# EAGLE board mini_shirasu (EAGLE 9.6.2)
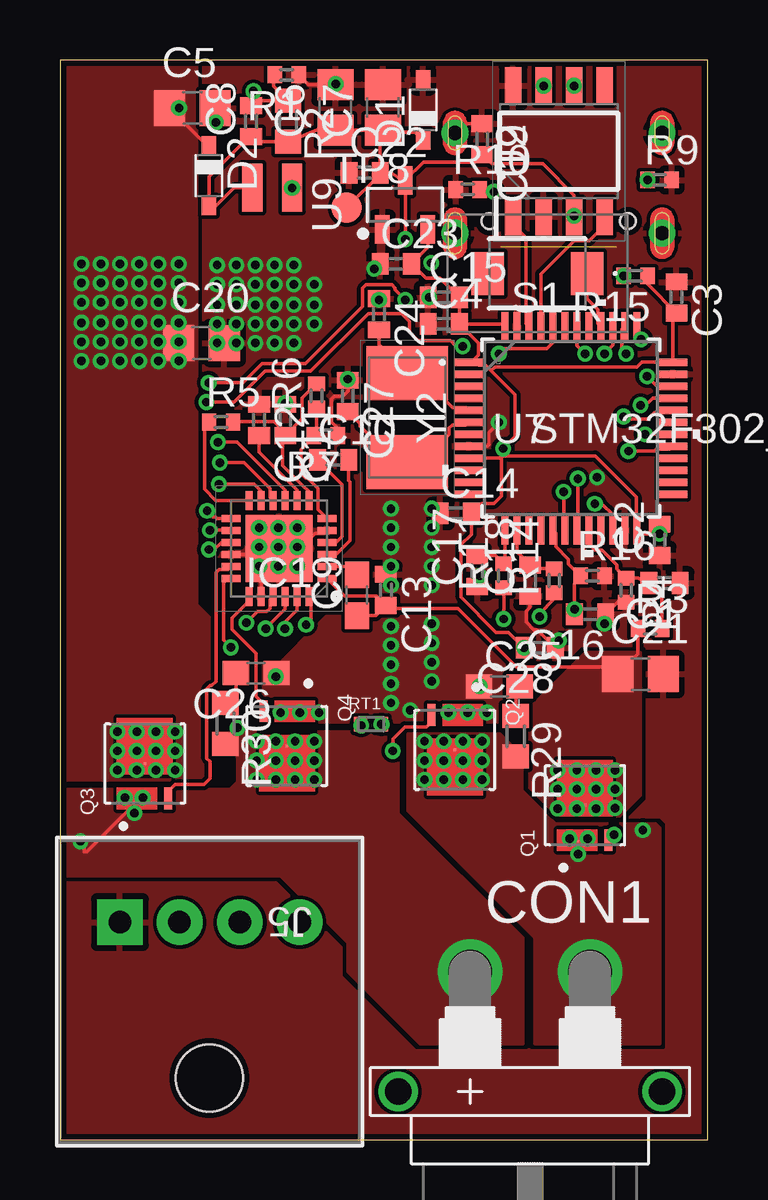
[diagram p0: board, top side]
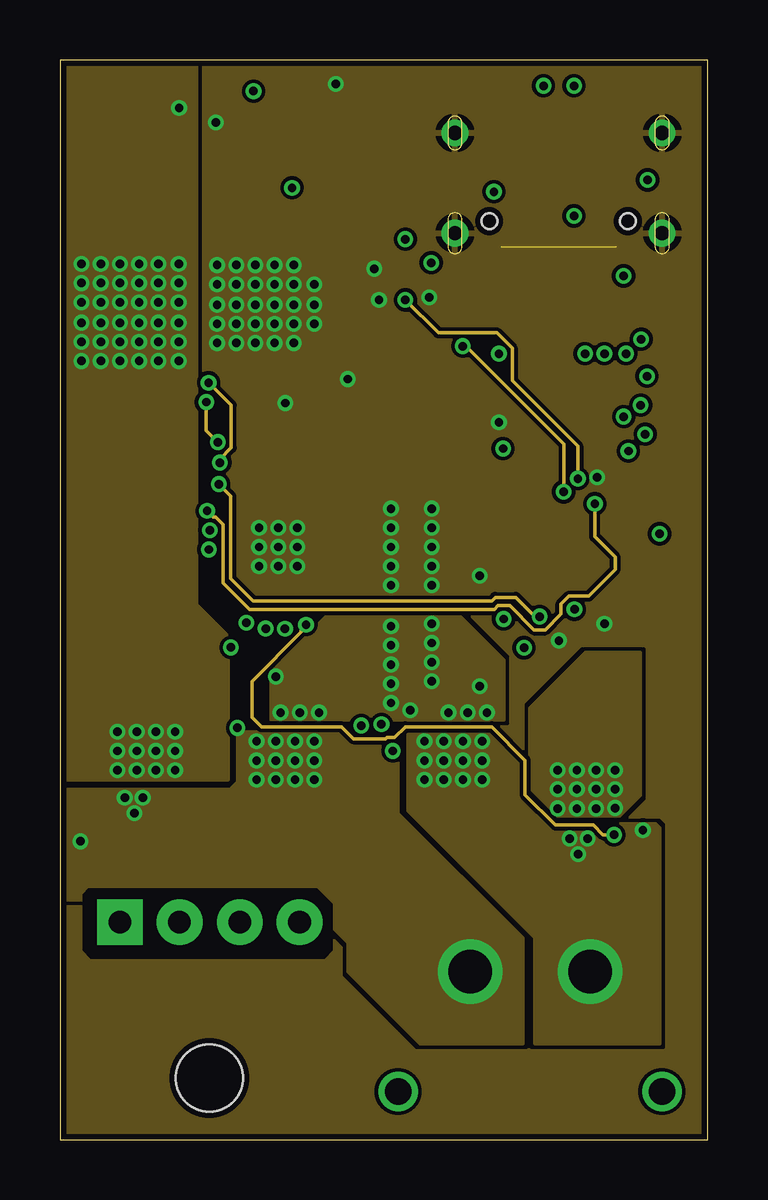
[diagram p1: board, inner layer Route2]
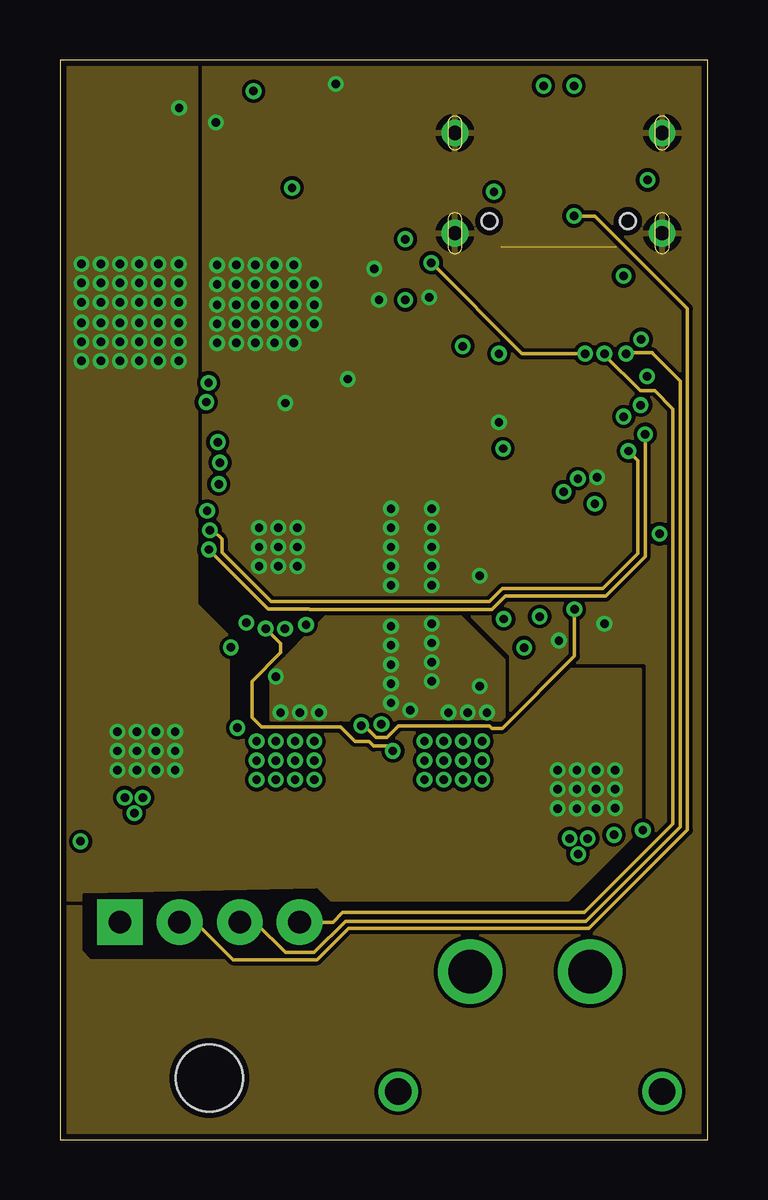
[diagram p2: board, inner layer Route15]
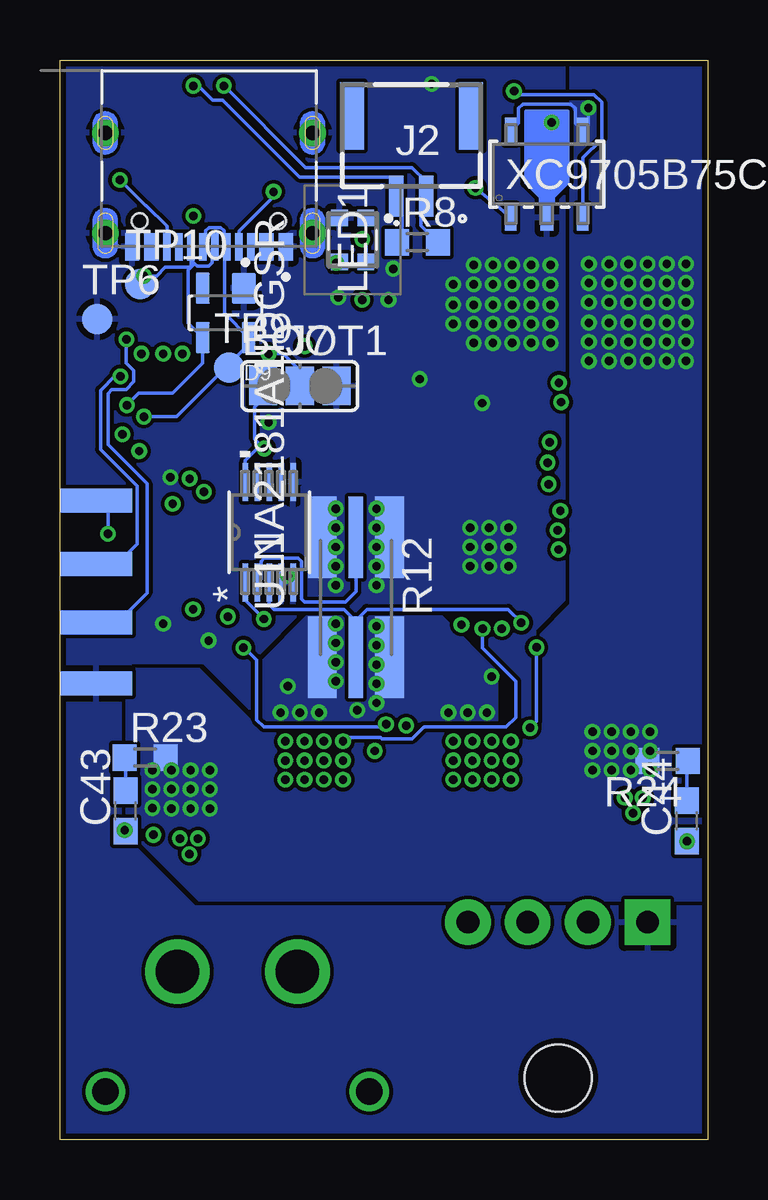
[diagram p3: board, bottom side, seen from below]

Size 27 x 45 mm. Coordinates in mm from the lower left corner, seen from the top.
Outline: 0,0 27,0 27,45 0,45 0,0
Copper layers (1+2*15+16): Top 0.035mm / dielectric 1.5mm / Route2 0.0175mm / dielectric 1.1mm / Route15 0.0175mm / dielectric 0.2mm / Bottom 0.035mm
Design rules "SeeedStudio_2layer_DRU_no_angle_20140221 *": minimum track width 6mil, minimum drill 12mil, track to track 6mil, track to pad 6mil, pad to pad 6mil, via to via 6mil, smd to smd 0mil, copper to edge 10mil, drill to drill 10mil, minimum pad ring 10mil, minimum via ring 6mil, stop-mask expansion 2mil, vias tented up to drill 100mil, thermal gap 10mil

## Footprints (pad centres in the part's own frame; a part is rotated, then mirrored left to right if it is on the bottom)
SJ_2 = smd 1.168 x 1.6: 1 -1.524,0; 2 0,0; 3 1.524,0
C0402 = smd 0.7 x 0.9: 1 -0.65,0; 2 0.65,0
C0805 = smd 1.3 x 1.5: 1 -0.95,0; 2 0.95,0
C0603 = smd 1.1 x 1: 1 -0.85,0; 2 0.85,0
XT30PW-F = drill 1.8: + 2.5,0; - -2.5,0 | drill 1.1: P$3 -5.5,5; P$4 5.5,5
SOD323_ST = smd 0.8 x 0.6: A 1.25,0; C -1.25,0
SOT143 = smd 0.99 x 1.3: 1 -0.76,-1.025 | smd 0.59 x 1.3: 2 0.96,-1.025; 3 0.96,1.025; 4 -0.96,1.025
QFN50P400X400X100-25N = smd 0.8 x 0.3: 1 -2,1.25; 2 -2,0.75; 3 -2,0.25; 4 -2,-0.25; 5 -2,-0.75; 6 -2,-1.25; 13 2,-1.25; 14 2,-0.75; 15 2,-0.25; 16 2,0.25; 17 2,0.75; 18 2,1.25 | smd 0.3 x 0.8: 7 -1.25,-2; 8 -0.75,-2; 9 -0.25,-2; 10 0.25,-2; 11 0.75,-2; 12 1.25,-2; 19 1.25,2; 20 0.75,2; 21 0.25,2; 22 -0.25,2; 23 -0.75,2; 24 -1.25,2 | smd 2.8 x 2.8: 25 0,0
BM02B-GHS-TBT_1 = smd 0.6 x 1.7: 1 0.625,0; 2 -0.625,0 | smd 1 x 2.8: 3 -2.475,-3.35; 4 2.475,-3.35
CONN4_1744426-4 = drill 0.94 pad 1.905 square: 1 7.493,0 | drill 0.94 pad 1.905: 2 5.004,0; 3 2.489,0; 4 0,0 | hole 2.794: 3.759,6.502
NELTRON_5077CR-16SMC2-BK-TR = smd 0.6 x 1.15: A1_B12 -3.2,1.065; A4_B9 -2.4,1.065; B1_A12 3.2,1.065; B4_A9 2.4,1.065 | smd 0.3 x 1.15: A5 -1.25,1.065; A6 -0.25,1.065; A7 0.25,1.065; A8 1.25,1.065; B5 1.75,1.065; B6 0.75,1.065; B7 -0.75,1.065; B8 -1.75,1.065 | drill 0.6 pad 1: S1 -4.32,-3.68; S2 4.32,-3.68; S3 -4.32,0.5; S4 4.32,0.5 | hole 0.65: -2.89,0; 2.89,0
INDUCTOR_1008 = smd 0.85 x 2: P$1 0.825,0; P$2 -0.825,0
WS2812C2020 = smd 0.7 x 0.7: 1 0.915,-0.55; 2 0.915,0.55; 3 -0.915,0.55; 4 -0.915,-0.55
TRANS_BSZ146N10LS5ATMA1 = smd 0.1 x 0.1: 1_3 -1.5,0.3; 5_8 0,0 | smd 0.9 x 0.34: 4 -1.45,-0.975
R0402 = smd 0.6 x 0.7: 1 -0.5,0; 2 0.5,0
R0603 = smd 1 x 1.1: 1 -0.85,0; 2 0.85,0
2512-4PAD = smd 3.4 x 1.2: 1 -2.5,1.4; 2 -2.5,-1.4; 3 2.5,1.4; 4 2.5,-1.4 | smd 3.4 x 0.6: 5 -2.5,0; 6 2.5,0
THRMC1005X55N = smd 0.54 x 0.6: 1 -0.432,0; 2 0.432,0
TS1088AR02016 = smd 1.35 x 1.8: 1 -2.075,0; 2 2.075,0
B1,27 = smd 1.27 x 1.27: TP 0,0
SOT-89-5_TOR-M = smd 0.483 x 1.118: 1 -1.5,-1.803; 3 1.5,-1.803; 4 1.5,1.803; 5 -1.5,1.803 | smd 0.533 x 1.118: 2 0,-1.803
SOIC127P600X175-8N = smd 1.55 x 0.7: 1 -2.725,1.905; 2 -2.725,0.635; 3 -2.725,-0.635; 4 -2.725,-1.905; 5 2.725,-1.905; 6 2.725,-0.635; 7 2.725,0.635; 8 2.725,1.905
LQFP48-7X7MM = smd 1.194 x 0.305: 1 -4.25,2.75; 2 -4.25,2.25; 3 -4.25,1.75; 4 -4.25,1.25; 5 -4.25,0.75; 6 -4.25,0.25; 7 -4.25,-0.25; 8 -4.25,-0.75; 9 -4.25,-1.25; 10 -4.25,-1.75; 11 -4.25,-2.25; 12 -4.25,-2.75; 25 4.25,-2.75; 26 4.25,-2.25; 27 4.25,-1.75; 28 4.25,-1.25; 29 4.25,-0.75; 30 4.25,-0.25; 31 4.25,0.25; 32 4.25,0.75; 33 4.25,1.25; 34 4.25,1.75; 35 4.25,2.25; 36 4.25,2.75 | smd 0.305 x 1.194: 13 -2.75,-4.25; 14 -2.25,-4.25; 15 -1.75,-4.25; 16 -1.25,-4.25; 17 -0.75,-4.25; 18 -0.25,-4.25; 19 0.25,-4.25; 20 0.75,-4.25; 21 1.25,-4.25; 22 1.75,-4.25; 23 2.25,-4.25; 24 2.75,-4.25; 37 2.75,4.25; 38 2.25,4.25; 39 1.75,4.25; 40 1.25,4.25; 41 0.75,4.25; 42 0.25,4.25; 43 -0.25,4.25; 44 -0.75,4.25; 45 -1.25,4.25; 46 -1.75,4.25; 47 -2.25,4.25; 48 -2.75,4.25
SOT95P240X110-3 = smd 1.18 x 0.609: 1 -1.024,0.95; 2 -1.024,-0.95; 3 1.024,0
DGS10 = smd 1.575 x 0.229: 1 -2.095,1; 2 -2.095,0.5; 3 -2.095,0; 4 -2.095,-0.5; 5 -2.095,-1; 6 2.095,-1; 7 2.095,-0.5; 8 2.095,0; 9 2.095,0.5; 10 2.095,1
PIN_HEADER = smd 3 x 1: 1 0,5.08; 2 0,2.54; 3 0,0.1; 4 0,-2.54
RESC5032X135N = smd 2.25 x 3.4: 1 -1.85,0; 2 1.85,0

## Placement (x,y rotation side)
BOOT1  [SJ_2]  17,31.41 0 bottom
C1  100n  [C0402]  25.2,23.2 180 top
C2  100n  [C0402]  25,25 90 top
C3  100n  [C0402]  25.7,35.1 270 top
C4  100n  [C0402]  16,34 0 top
C5  2.2u  [C0805]  5.52,43 0 top
C6  22u  [C0805]  11.48,43.02 90 top
C7  22u  [C0805]  13.46,43.02 90 top
C8  18p  [C0402]  7.97,42.45 90 top
C9  1u  [C0603]  12.39,22.69 90 top
C10  100n  [C0402]  11.39,28.33 0 top
C11  1u25V  [C0402]  9.4,30 270 top
C12  1u25V  [C0402]  8.3,30 270 top
C13  100n  [C0402]  13.59,22.91 270 top
C14  10n  [C0402]  16.5,26.1 0 top
C15  1u25V  [C0402]  16,35.1 0 top
C16  1u25V  [C0402]  22.1,21.9 180 top
C17  330p  [C0402]  17.4,23.7 90 top
C18  330p  [C0402]  19.6,23.3 90 top
C19  100n  [C0402]  17.6,41.7 270 top
C20  10u  [C0805]  5.9,33.2 0 top
C21  10u  [C0805]  24.2,19.4 0 top
C22  1u25V  [C0402]  12.7,40.3 0 top
C23  1u25V  [C0402]  14,36.5 0 top
C24  30p  [C0402]  13.3,34.4 270 top
C25  6800p  [C0603]  18.32,18.88 0 top
C26  6800p  [C0603]  8.18,19.44 180 top
C27  30p  [C0402]  12,31 270 top
C28  100n  [C0402]  20,20.5 180 top
C43  6800p  [C0603]  24.26,13.7 90 bottom
C44  6800p  [C0603]  0.86,13.28 90 bottom
CON1  XT30PW-F  [XT30PW-F]  19.6,7 180 top
D1  PMEG6010CEJ,115  [SOD323_ST]  15.14,42.92 90 top
D2  PMEG6010CEJ,115  [SOD323_ST]  6.21,40.18 270 top
D9  SP0503BAHTG  [SOT143]  20.09,34.46 180 bottom
IC1  DRV8701PRGER  [QFN50P400X400X100-25N]  9.13,24.64 180 top
J2  BM02B-GHS-TBT_LF__SN_  [BM02B-GHS-TBT_1]  12.35,39.32 180 bottom
J5  EP2.5-4-SIDE  [CONN4_1744426-4]  9.99,9.06 180 top
J7  5077CR-16SMC2-BK-TR  [NELTRON_5077CR-16SMC2-BK-TR]  20.79,38.28 180 bottom
L1  6.8u  [INDUCTOR_1008]  8.85,39.67 0 top
LED1  WS2812C-2020  [WS2812C2020]  14.8,37.5 90 bottom
Q1  BSZ042N06NSATMA1  [TRANS_BSZ146N10LS5ATMA1]  21.89,13.93 90 top
Q2  BSZ042N06NSATMA1  [TRANS_BSZ146N10LS5ATMA1]  16.46,16.25 270 top
Q3  BSZ042N06NSATMA1  [TRANS_BSZ146N10LS5ATMA1]  3.54,15.67 90 top
Q4  BSZ042N06NSATMA1  [TRANS_BSZ146N10LS5ATMA1]  9.46,16.41 270 top
R1  120k  [R0402]  9.45,44.38 180 top
R2  680k  [R0603]  9.51,42.45 270 top
R3  10k  [R0402]  24.6,21.3 0 top
R4  1k  [R0402]  23.6,22.9 270 top
R5  68k  [R0402]  6.72,29.91 0 top
R6  220k  [R0402]  10.7,31 90 top
R7  20k  [R0402]  11.08,29.35 180 top
R8  120  [R0603]  12.1,37.4 0 bottom
R9  5k1  [R0402]  25,40 0 top
R10  5k1  [R0402]  17,39.6 0 top
R11  1k  [R0402]  18.5,23.5 90 top
R12  1m  [2512-4PAD]  14.66,22.61 270 bottom
R14  1k  [R0402]  20.6,23.3 90 top
R15  1k5  [R0402]  24,36 180 top
R16  3k3  [R0402]  22.2,23.5 0 top
R23  2  [R0603]  23.45,15.92 0 bottom
R24  2  [R0603]  1.67,15.78 180 bottom
R29  2  [R0603]  19,16.81 270 top
R30  2  [R0603]  6.9,17.34 270 top
RT1  NCP15XH103F03RC  [THRMC1005X55N]  12.97,17.31 0 top
S1  TS-1088-AR02016  [TS1088AR02016]  19.9,36.1 180 top
TP6  TPB1,27  [B1,27]  25.45,34.2 0 bottom
TP8  TPB1,27  [B1,27]  11.95,38.84 0 top
TP9  TPB1,27  [B1,27]  19.95,32.18 0 bottom
TP10  TPB1,27  [B1,27]  23.65,35.66 0 bottom
U1  XC9705B75CPR-GSOT-89-5_TOR-M  [SOT-89-5_TOR-M]  6.7,40.24 0 bottom
U2  TJA1050T_CM,118  [SOIC127P600X175-8N]  20.8,41.2 90 top
U7  STM32F302_303C2  [LQFP48-7X7MM]  21.3,29.65 0 top
U9  XC6206  [SOT95P240X110-3]  14.39,38.96 90 top
U11  INA2181A1IDGSR  [DGS10]  18.28,25.31 90 bottom
U$1  PIN_HEADERPIN_HEADER  [PIN_HEADER]  25.5,24.1 180 bottom
Y2  X50328MSB2GI  [RESC5032X135N]  14.48,30.1 270 top

## Library data of the parts
BOOT1 = jumper
C1-C28 C43 C44 = rcl; SPICEPREFIX: C
CON1 = amass
D1 D2 = nexperia
D9 = Littelfuse; DESCRIPTION: 8.5V Clamp Ipp Tvs Diode Surface Mount SOT-143-4; DIGI-KEY_PART_NUMBER: F2715CT-ND; DIGI-KEY_PURCHASE_URL: https://www.digikey.com/product-detail/en/littelfuse-inc/SP0503BAHTG/F2715CT-ND/1154322?utm_source=snapeda&utm_medium=aggregator&utm_campaign=symbol; MF: Littelfuse Inc.; MP: SP0503BAHTG; PACKAGE: SOT-143 Littelfuse
IC1 = DRV8701PRGER; ARROW_PART_NUMBER: DRV8701PRGER; ARROW_PRICE-STOCK: https://www.arrow.com/en/products/drv8701prger/texas-instruments?utm_currency=USD&region=nac; DESCRIPTION: Motor / Motion / Ignition Controllers & Drivers Brushed DC Motor Gate Driver (PH/EN, PWM Ctrl) 24-VQFN -40 to 125; HEIGHT: 1mm; MANUFACTURER_NAME: Texas Instruments; MANUFACTURER_PART_NUMBER: DRV8701PRGER; MOUSER_PART_NUMBER: 595-DRV8701PRGER; MOUSER_PRICE-STOCK: https://www.mouser.co.uk/ProductDetail/Texas-Instruments/DRV8701PRGER?qs=UfUFg%2FkmHHH%2F%252BOfCOaHj7g%3D%3D
J2 = BM02B-GHS-TBT_LF__SN_; DESCRIPTION: GH 1.25mm header top entry 2 way JST GH Series, 1.25mm Pitch 2 Way Shrouded Straight PCB Header, Surface Mount, Solder Termination; HEIGHT: mm; MANUFACTURER_NAME: JST (JAPAN SOLDERLESS TERMINALS); MANUFACTURER_PART_NUMBER: BM02B-GHS-TBT(LF)(SN)
J5 = con-ep2.5; MANUFACTURER_PART_NUMBER: 17444264; VENDOR: TE Connectivity
J7 = 5077CR-16SMC2-BK-TR; AVAILABILITY: Not in stock; CHECK_PRICES: https://www.snapeda.com/parts/5077CR-16SMC2-BK-TR/Neltron/view-part/?ref=eda; DESCRIPTION: USB 3.1 C Type Female with Peg; MF: Neltron; MP: 5077CR-16SMC2-BK-TR; PACKAGE: Package; PRICE: None; SNAPEDA_LINK: https://www.snapeda.com/parts/5077CR-16SMC2-BK-TR/Neltron/view-part/?ref=snap
L1 Q1-Q4 U1 U$1 = CRS_EAGLE_Lib
LED1 = WS2812C-2020; DESCRIPTION: Intelligent control LED integrated light source; HEIGHT: 0.84mm; MANUFACTURER_NAME: Worldsemi; MANUFACTURER_PART_NUMBER: WS2812C-2020
R1-R11 R14-R16 R23 R24 R29 R30 = rcl; SPICEPREFIX: R
R12 = shunt-resistor
RT1 = NCP15XH103F03RC; AVAILABILITY: Good; DESCRIPTION: NTC Thermistor 10k 0402 (1005 Metric); MF: Murata; MP: NCP15XH103F03RC; PACKAGE: 1005 Taiyo Yuden; PRICE: None; PURCHASE-URL: https://pricing.snapeda.com/search/part/NCP15XH103F03RC/?ref=eda
S1 = TS-1088-AR02016; DESCRIPTION: Tact Switch; HEIGHT: 2mm; MANUFACTURER_NAME: XUNPU; MANUFACTURER_PART_NUMBER: TS-1088-AR02016
TP6 TP8-TP10 = testpad
U2 = TJA1050T_CM_118; ARROW_PART_NUMBER: TJA1050T/CM,118; ARROW_PRICE-STOCK: https://www.arrow.com/en/products/tja1050tcm118/nxp-semiconductors?utm_currency=USD&region=europe; DESCRIPTION: NXP - TJA1050T/CM,118 - CAN TRANSCEIVER, 1TX/RX, SOIC-8; HEIGHT: 1.75mm; MANUFACTURER_NAME: NXP; MANUFACTURER_PART_NUMBER: TJA1050T/CM,118; MOUSER_PART_NUMBER: 771-TJA1050T/CM118; MOUSER_PRICE-STOCK: https://www.mouser.co.uk/ProductDetail/NXP-Semiconductors/TJA1050T-CM118?qs=5XOdhvmYM0NFFspw0VP5sA%3D%3D
U7 = stm32_mcu; COPYRIGHT: Copyright (C) 2016 Accelerated Designs. All rights reserved; MANUFACTURER_PART_NUMBER: STM32F302_303C2; VENDOR: STMicroelectronics
U9 = torex
U11 = texas-instruments; BUILT_BY: EMA_Jessica; COPYRIGHT: Copyright (C) 2018 Accelerated Designs. All rights reserved; MANUFACTURER_PART_NUMBER: INA2181A1IDGSR; VENDOR: Texas Instruments
Y2 = X50328MSB2GI; DESCRIPTION: SMD Crystal Resonators 8MHz +/-10ppm SMD-5032_2P RoHS; HEIGHT: 1.35mm; MANUFACTURER_NAME: Yangxing Tech; MANUFACTURER_PART_NUMBER: X50328MSB2GI

## Nets
!EMS: IC1.13 U7.22
+3V3: BOOT1.1 C2.2 C3.2 C4.2 C14.2 C15.2 C23.2 C28.2 R15.1 RT1.2 S1.2 U7.1 U7.9 U7.24 U7.36 U7.48 U9.2 U11.10 U$1.4
+5V: C6.1 C7.1 C8.1 C19.2 C22.2 D1.C D2.A J5.2 L1.P$2 LED1.4 R2.2 TP8.TP U2.3 U9.3
APWM: IC1.15 U7.30
AVDD: C11.2 IC1.7 R5.2 R6.2
BOOT0: BOOT1.2 U7.44
BPWM: IC1.14 U7.29
BUTTON: S1.1 U7.40
CAN_H: J2.2 R8.2 U2.7
CAN_L: J2.1 R8.1 U2.6
CAN_RX: U2.4 U7.45
CAN_TX: U2.1 U7.46
CC1: J7.A5 R10.2
CC2: J7.B5 R9.1
CPH: C10.2 IC1.3
CPL: C10.1 IC1.4
DIN: LED1.3 U7.42
DVDD: C12.2 IC1.8
ENC_A: J5.3 U7.38
ENC_B: J5.4 U7.39
FB: C8.2 R1.2 R2.1 U1.3
GH1: IC1.17 Q3.4
GH2: IC1.24 Q1.4
GL1: IC1.19 Q4.4
GL2: IC1.22 Q2.4
GNDA: BOOT1.3 C1.1 C2.1 C3.1 C4.1 C5.2 C6.2 C7.2 C11.1 C12.1 C13.1 C14.1 C15.1 C16.1 C17.1 C18.1 C19.1 C20.2 C21.2 C22.1 C23.1 C24.1 C27.1 C28.1 D1.A D9.1 IC1.5 IC1.16 IC1.20 IC1.25 J5.1 J7.A1_B12 J7.B1_A12 J7.S1 J7.S2 J7.S3 J7.S4 LED1.2 R1.1 R4.2 R7.1 R9.2 R10.1 R12.1 R12.2 R16.2 TP6.TP U1.2 U2.2 U2.8 U7.8 U7.23 U7.35 U7.47 U9.1 U11.4 U11.5 U11.6 U$1.1
IDRIVE: IC1.12 R5.1
ISENSEA: C18.2 R14.2 U7.14
ISENSEB: C17.2 R11.2 U7.13
LX: L1.P$1 U1.1
N$12: C25.2 R29.1
N$13: C26.2 R30.1
N$15: C24.2 U7.5 Y2.1
N$20: C27.2 U7.6 Y2.2
N$31: R12.5 U11.2
N$38: C44.2 R24.1
N$39: C43.2 R23.1
NFAULT: IC1.9 U7.18
OPOUTA: IC1.11 R14.1
OPOUTB: R11.1 U11.1
OUT+: C43.1 CON1.- IC1.23 Q1.1_3 Q2.5_8 R29.2
OUT-: C44.1 CON1.+ IC1.18 Q3.1_3 Q4.5_8 R30.2
SNSOUT: IC1.10 U7.19
SP: IC1.21 R12.6 U11.3
SWCLK: U7.37 U$1.2
SWDIO: U7.34 U$1.3
TEMP: C16.2 R16.1 RT1.1 U7.17
USB_DM: D9.4 J7.A7 J7.B7 TP9.TP U7.32
USB_DP: D9.3 J7.A6 J7.B6 R15.2 TP10.TP U7.33
VBUS: J7.A4_B9 J7.B4_A9
VCC: C5.1 C9.1 C13.2 C20.1 C21.1 D2.C IC1.1 Q1.5_8 Q3.5_8 R3.1 R23.2 R24.2 U1.4 U1.5
VCP: C9.2 IC1.2
VCS: C25.1 C26.1 Q2.1_3 Q4.1_3 R12.3 R12.4
VREF: IC1.6 R6.1 R7.2
VSENSE: C1.2 R3.2 R4.1 U7.20

## Tracks (layer width: path | path; a pad name or v marks a point on that pad's centre or on a via)
!EMS  (via drill 0.35)
  Top 0.152: IC1.13 6.55,25.89 6.48,25.96 6.39,25.96 v6.14,26.21 | v22.3,26.5 22.6,26.5 23.05,26.05 U7.22
  Route2 0.152: v6.14,26.21 6.39,25.96 6.48,25.96 6.81,25.63 6.81,25.17 6.8,25.16 6.8,23.2 7.9,22.1 18.11,22.1 18.27,22.26 18.76,22.26 19.77,21.24 20.23,21.24 20.89,21.91 20.89,22.33 21.22,22.66 22.04,22.66 23.16,23.77 23.16,24.27 22.3,25.13 v22.3,26.5
+3V3  (via drill 0.35)
  Top 0.152: U9.2 15.34,37.19 C23.2 15.25,35.9 15.85,35.9 C15.2 | C15.2 C4.2 | C4.2 18.45,34 U7.48 | U7.9 18.3,28.4 18.4,28.5 | 18.4,28.5 18.7,28.8 v18.48,28.8 18.98,29.3 18.98,31.05 17.98,32.05 | C4.2 17.45,33.2 17.45,32.7 17.15,32.4 U7.1 17.45,32.4 17.45,32.28 17.74,32.28 17.98,32.05 | 17.98,32.05 18.13,32.2 24.05,32.2 24.25,32.4 U7.36 25.55,34.3 C3.2 24.5,35.65 R15.1 | 18.4,28.5 22.32,28.5 24.03,26.79 24.03,25.42 U7.24 24.2,25.25 v25,25.25 C2.2 | C15.2 17.65,36.1 S1.2 | 18.4,28.5 18.4,26.82 18.1,26.52 17.57,26.52 C14.2 17.15,25.22 16.72,24.8 16.72,22.61 18.18,21.14 18.71,21.14 C28.2
  Bottom 0.152: U11.10 19.28,28.3 18.79,28.8 v18.48,28.8 18.88,29.2 18.88,30.53 18.13,31.28 BOOT1.1 | v25,25.25 25,26.14 U$1.4 | RT1.2 13.51,17.2 18.5,17.2 18.8,17.5 18.8,20 19.3,20.5 C28.2
  other vias: 13.4,17.31 19.35,20.5
+5V  (via drill 0.35)
  Top 0.152: L1.P$2 7.25,39.67 6.36,38.78 D2.A 6.21,40.13 7.88,41.8 C8.1 8.17,41.6 R2.2 11.25,42.3 C6.1 11.5,42.09 11.5,42.07 C7.1 13.46,42 | 13.4,40.3 C22.2 13.35,41.02 13.34,41.03 13.34,41.68 13.42,41.77 13.46,41.84 13.46,42 | 13.4,40.3 13.79,40.3 14.11,40.1 14.22,39.98 U9.3 | U2.3 v21.43,38.5 21.43,39.38 20.14,40.67 18,40.67 17.62,41.05 C19.2 17.3,40.75 15.15,40.75 U9.3 | D1.C 14.81,42 13.46,42 | TP8.TP 13.4,40.29 13.4,40.3 | v14.4,37.53 U9.3
  Route15 0.152: J5.2 5.65,9.06 7.22,7.5 10.73,7.5 12.03,8.79 22.06,8.79 26.17,12.9 26.17,34.63 22.3,38.5 v21.43,38.5
  Bottom 0.152: LED1.4 14.25,37.38 v14.4,37.53
APWM  (via drill 0.35)
  Top 0.152: U7.30 v24.4,29.4 | IC1.15 6.73,24.89 6.43,24.59 v6.2,24.59
  Route15 0.152: v6.2,24.59 8.68,22.12 10.39,22.12 10.41,22.1 18.01,22.1 18.57,22.66 22.76,22.66 24.4,24.3 v24.4,29.4
AVDD
  Top 0.152: IC1.7 10.38,27.01 10.12,27.27 10.11,27.27 9.29,28.09 9.29,29.24 C11.2 | R6.2 10.1,30.9 10.1,30.05 C11.2 | C11.2 9.54,29.31 8.92,29.93 7.24,29.93 R5.2
BOOT0  (via drill 0.35)
  Top 0.152: v18.3,32.76 18.52,32.97 20.3,32.97 20.55,33.23 U7.44
  Bottom 0.152: v18.3,32.76 17.7,32.76 17,32.06 BOOT1.2
BPWM  (via drill 0.35)
  Top 0.152: U7.29 25.43,28.78 24.86,28.78 24.78,28.7 v23.7,28.7 | v6.25,25.4 6.55,25.4 6.56,25.41 7.11,25.41 IC1.14
  Route15 0.152: v6.25,25.4 6.3,25.35 6.43,25.35 6.76,25.02 6.76,24.47 8.81,22.42 17.9,22.42 18.44,22.96 22.63,22.96 24.09,24.43 24.09,28.3 v23.7,28.7
BUTTON
  Top 0.152: U7.40 22.43,34.02 22.43,34.59 21.98,35.05 S1.1
CAN_H  (via drill 0.35)
  Bottom 0.152: v20.16,43.92 16.76,40.52 12.32,40.52 11.72,39.92 J2.2 11.95,39.09 11.95,38.1 R8.2
CAN_L  (via drill 0.35)
  Bottom 0.152: v21.43,43.92 21.23,43.92 20.64,43.33 20.23,43.33 17.02,40.12 13.28,40.12 12.97,39.82 J2.1 12.75,39.09 12.75,37.6 R8.1
CAN_RX
  Top 0.152: U2.4 22.7,38.1 22.08,37.47 21.45,37.47 20.05,36.07 U7.45
CAN_TX
  Top 0.152: U7.46 19.43,34.02 19.43,37.59 18.89,38.13 U2.1
CC1  (via drill 0.35)
  Top 0.152: v18.09,39.51 17.59,39.51 R10.2
  Bottom 0.152: v18.09,39.51 18.09,39.31 19.54,37.86 J7.A5
CC2  (via drill 0.35)
  Bottom 0.152: R9.1 23.43,38.94 23.41,38.94 22.54,38.07 J7.B5
  other vias: 24.5,40
CPH
  Top 0.152: IC1.3 11.52,24.39 12.09,24.96 12.09,27.41 12.04,27.46 C10.2
CPL
  Top 0.152: IC1.4 11.5,24.89 11.76,25.14 11.76,27.31 C10.1
DIN  (via drill 0.35)
  Top 0.152: v21.89,32.76 21.55,33.1 U7.42
  Route15 0.152: v15.48,36.54 19.27,32.76 v21.89,32.76
  Bottom 0.152: LED1.3 15.44,36.59 v15.48,36.54
DVDD
  Top 0.152: IC1.8 9.88,27.07 8.3,28.65 C12.2
ENC_A  (via drill 0.35)
  Top 0.152: v23.6,32.76 23.43,32.92 23.43,33.78 U7.38
  Route15 0.152: J5.3 7.56,9 8.2,9 9.4,7.8 10.6,7.8 11.9,9.1 21.93,9.1 25.86,13.03 25.86,31.62 24.7,32.78 24.7,32.8 23.64,32.8 v23.6,32.76
ENC_B  (via drill 0.35)
  Top 0.152: v22.7,32.76 23.05,33.11 U7.39
  Route15 0.152: J5.4 11.39,9.06 11.79,9.46 21.86,9.46 25.56,13.16 25.56,30.45 24.8,31.21 24.19,31.21 22.7,32.7 v22.7,32.76
FB  (via drill 0.35)
  Top 0.152: R1.2 8.93,44.4 8.91,44.41 8.91,43.9 R2.1 8.17,43.3 C8.2 7.97,43.6 v8.07,43.7
  Bottom 0.152: v8.07,43.7 7.93,43.56 4.74,43.56 4.41,43.23 4.41,41.71 5.2,40.92 U1.3
GH1
  Top 0.152: IC1.17 7.01,23.77 6.63,23.77 6.5,23.64 6.5,19.1 6.32,18.92 6.25,18.92 6.12,18.79 6.12,15.89 6.25,15.76 6.25,15.05 6,14.8 4.79,14.8 4.51,14.52 Q3.4
GH2  (via drill 0.35)
  Top 0.152: v10.26,21.46 10.46,21.66 10.46,22.56 IC1.24 | v23.1,12.7 23.1,12.6 23.14,12.56 23.07,12.48 Q1.4
  Route2 0.152: v10.26,21.46 10.06,21.26 10.06,21.16 8,19.1 8,17.6 8.4,17.2 11.73,17.2 12.23,16.7 13.58,16.7 13.63,16.76 13.96,16.76 14.4,17.2 18,17.2 19.39,15.81 19.39,14.37 20.66,13.11 22.23,13.11 22.64,12.7 v23.1,12.7
GL1
  Top 0.152: Q4.4 8.48,18.16 8.18,18.47 8.18,20.27 7.18,21.26 7.18,21.74 7.88,22.44 IC1.19
GL2  (via drill 0.35)
  Top 0.152: IC1.22 9.38,22.11 v8.57,21.3 | Q2.4 15.48,17.4 15.29,17.2 14.38,17.2 13.88,16.7 v13.88,16.2
  Route15 0.152: v8.57,21.3 9.2,20.68 9.2,20.3 8,19.1 8,17.6 8.4,17.2 11.7,17.2 12.3,16.6 12.88,16.6 13.08,16.4 13.68,16.4 v13.88,16.2
GNDA  (via drill 0.35)
  Top 0.152: IC1.20 8.38,23.89 IC1.25 | IC1.16 8.88,24.39 IC1.25 | IC1.5 11.01,25.27 10.63,25.27 10.01,24.64 IC1.25 | C6.2 10.36,43.97 R1.1 | v18.3,29.9 17.88,29.48 17.88,28.95 17.82,28.9 U7.8 | 22.75,21.4 22.59,21.24 | C16.1 23.25,22.4 R4.2 | R7.1 11.58,29.65 11.32,29.91 11.32,30.87 11.45,31 11.8,31 12,31.2 C27.1 | C17.1 17.4,23.4 v17.5,23.5 | J7.S1 16.86,42.35 C19.1 | C23.1 13.15,36.3 v13.1,36.3 | C15.1 v15.4,35.1 | C18.1 19.6,22.19 19.44,22.03 19.44,21.57 19.77,21.24 19.91,21.24 C28.1
  Bottom 0.152: v6.5,42.4 6.9,42 6.9,38.64 U1.2 | U11.5 17.5,23.43 v17.5,23.5 | J7.B1_A12 24.55,37.22 J7.S4
  other vias: 11.5,44 22.4,27.6 15.5,26.3 20.8,20.8 15.5,23.9 15.5,24.7 15.5,25.5 13.8,23.9 13.8,24.7 13.8,25.5 15.5,23.1 13.8,23.1 13.8,26.3 8.3,25.5 9.1,25.5 9.9,25.5 8.3,24.7 9.1,24.7 9.9,24.7 8.3,23.9 9.1,23.9 9.9,23.9 22.7,21.5 9.4,30.7 12,31.7 13.3,35 7.35,34.8 8.15,34.8 8.95,34.8 7.35,34 8.15,34 8.95,34 7.35,33.2 8.15,33.2 8.95,33.2 6.55,34.8 6.55,34 6.55,33.2 7.35,36.45 8.15,36.45 8.95,36.45 7.35,35.65 8.15,35.65 8.95,35.65 6.55,36.45 6.55,35.65 9.75,34.8 9.75,34 9.75,33.2 9.75,36.45 9.75,35.65 10.6,34.8 10.6,34 10.6,35.65
  pour Top (rank 2): 0,45 0,0 27,0 27,45
  pour Bottom (rank 2): 0,45 0,0 27,0 27,45
  pour Route2 (rank 2): 0,45 0,0 27,0 27,45
  pour Route15 (rank 2): 0,45 0,0 27,0 27,45
  pour Bottom (no thermals): 12.3,27.2 12.3,23.1 16.9,23.1 16.9,27.2
IDRIVE
  Top 0.152: R5.1 6.02,29.71 6.02,27.11 6.49,26.64 IC1.12
ISENSEA
  Top 0.152: R14.2 19.75,23.8 C18.2 19.27,24.27 19.05,24.5 U7.14
ISENSEB
  Top 0.152: U7.13 18.55,24.05 R11.2 18.15,24.35 C17.2
LX  (via drill 0.35)
  Bottom 0.152: v9.68,39.67 8.23,38.47 U1.1
N$12
  Top 0.152: R29.1 19,18.71 C25.2
N$13
  Top 0.152: R30.1 7.34,18.65 C26.2
N$15
  Top 0.152: U7.5 16.93,30.52 16.36,30.52 14.93,31.95 Y2.1 13.3,33.13 C24.2
N$20
  Top 0.152: U7.6 16.93,29.78 16.36,29.78 16.22,29.65 16.22,29.39 15.08,28.25 Y2.2 13.98,28.25 12.5,29.73 12.5,29.85 C27.2
N$31
  Bottom 0.152: U11.2 18.62,23.37 18.62,24.1 18.49,24.23 17.07,24.23 16.94,24.1 16.94,22.54 16.8,22.4 15.1,22.4 14.66,22.84 R12.5
N$38
  Bottom 0.152: R24.1 0.87,15.73 C44.2
N$39
  Bottom 0.152: C43.2 24.26,15.88 R23.1
NFAULT  (via drill 0.35)
  Top 0.152: v6.58,29.07 7.38,29.07 9.38,27.07 IC1.9 | v6.1,30.74 7.27,30.74 8.55,32.03 10.46,32.03 12.86,34.43 14.24,34.43 14.58,34.09 14.58,33.65 14.92,33.3 16.27,33.3 16.51,33.07 v16.79,33.07 | U7.18 21,25.45 v21,27
  Route2 0.152: v6.1,30.74 6.1,29.55 v6.58,29.07 | v16.79,33.07 16.93,33.07 21,29 v21,27
NONE
  cutout Route15: 1,10.2 1,7.9 1.3,7.6 11,7.6 11.3,7.9 11.3,9.8 10.7,10.4
  cutout Route2: 1,10.2 1,7.9 1.3,7.6 11,7.6 11.3,7.9 11.3,9.8 10.7,10.4 1.2,10.4
OPOUTA  (via drill 0.35)
  Top 0.152: IC1.11 8.38,27.04 8.1,27.32 v6.62,27.32 | v20,21.8 20,21.93 20.6,22.53 R14.1
  Route2 0.152: v6.62,27.32 7.12,26.82 7.12,23.38 8.05,22.45 18,22.45 18.15,22.6 19,22.6 19.8,21.8 v20,21.8
OPOUTB  (via drill 0.35)
  Top 0.152: R11.1 v18.5,21.7
  Bottom 0.152: U11.1 19.28,22.48 v18.5,21.7
OUT+  (via drill 0.35)
  Top 0.152: v9.38,21.3 9.38,21.57 9.88,22.07 IC1.23 | v15.2,16.6 15.55,16.25 Q2.5_8
  Bottom 0.152: v9.38,21.3 9.38,20.48 8,19.1 8,17.6 8.4,17.2 11.83,17.2 12.33,16.7 13.58,16.7 13.63,16.76 15.04,16.76 v15.2,16.6 | C43.1 v24.3,12.9
  other vias: 16,16.6 16.8,16.6 17.6,16.6 15.2,15.8 16,15.8 16.8,15.8 17.6,15.8 15.2,15 16,15 16.8,15 17.6,15 21.6,11.9 21.25,12.55 22,12.55
  pour Top (no thermals): 14.5,16.9 14.5,13.7 19.8,8.4 19.8,4 25,4 25,13 24.85,13.15 20.65,13.15 19.25,14.55 19.25,16 18.35,16.9
  pour Route2 (no thermals): 14.5,16.9 14.5,13.7 19.8,8.4 19.8,4 25,4 25,13 24.85,13.15 20.65,13.15 19.25,14.55 19.25,16 18.35,16.9
OUT-  (via drill 0.35)
  Top 0.152: IC1.18 7.03,23.39 6.83,23.19 6.83,20.81 v7.13,20.51 | v7.4,17.16 6.9,16.66 R30.2 | C44.1 1,12.29 1,12 1.12,12 3.24,14.12 Q3.1_3
  Bottom 0.152: v7.13,20.51 7.13,17.43 v7.4,17.16
  other vias: 0.86,12.43 9,16.6 9.8,16.6 10.6,16.6 9,15.8 9.8,15.8 10.6,15.8 9,15 9.8,15 10.6,15 8.2,16.6 8.2,15.8 8.2,15 2.7,14.25 3.45,14.25 3.1,13.6
  pour Top (no thermals): 0,14.6 7.1,14.6 7.4,14.9 7.4,17 13.9,17 14.1,16.8 14.1,13.6 19.3,8.4 19.3,4 15,4 12,7 12,8.2 9.2,11 0,11
  pour Route2 (no thermals): 0,14.6 7.1,14.6 7.4,14.9 7.4,17 13.9,17 14.1,16.8 14.1,13.6 19.3,8.4 19.3,4 15,4 12,7 12,8.2 10.2,10 0,10
SNSOUT  (via drill 0.35)
  Top 0.152: IC1.10 8.76,26.76 8.76,27.14 7.68,28.22 v6.67,28.22 | v6.2,31.55 7.64,31.55 8.43,32.33 10.23,32.33 12.62,34.72 12.62,35.49 12.76,35.63 13.85,35.63 13.98,35.49 13.98,35.42 v14.4,35 | v21.59,27.55 21.59,25.44 U7.19
  Route2 0.152: v6.67,28.22 6.67,28.37 7.14,28.84 7.14,30.61 v6.2,31.55 | v14.4,35 15.77,33.63 18.22,33.63 18.86,32.99 18.86,31.64 21.59,28.91 v21.59,27.55
SP  (via drill 0.35)
  Top 0.152: v7.77,21.54 8.24,22.01 8.62,22.01 8.76,22.14 8.76,22.52 IC1.21
  Bottom 0.152: v7.77,21.54 8.32,22.09 14.2,22.09 14.66,21.64 R12.6 14.66,21.6 15.16,22.1 18.06,22.1 18.28,22.31 U11.3
SWCLK  (via drill 0.35)
  Top 0.152: v24.23,33.36 24.05,33.54 U7.37
  Bottom 0.152: U$1.2 24.6,21.56 23.37,22.79 23.37,27.34 25,28.96 25,31.1 24.84,31.26 24.24,31.26 23.92,31.59 23.92,32.05 24.23,32.37 v24.23,33.36
SWDIO  (via drill 0.35)
  Top 0.152: U7.34 24.89,31.4 v24.47,31.82
  Bottom 0.152: v24.47,31.82 24.71,31.82 25.3,31.23 25.3,28.77 23.77,27.23 23.77,24.83 24.6,24 U$1.3
TEMP  (via drill 0.35)
  Top 0.152: v12.56,17.26 12.54,17.26 RT1.1 | U7.17 20.67,25.28 20.67,24.71 21.2,24.18 21.2,24 R16.1 21.7,23.4 21.45,23.15 v21.45,22.1 C16.2
  Route15 0.152: v12.56,17.26 12.67,17.26 13.17,16.75 13.63,16.75 14.12,17.24 17.9,17.24 18,17.14 18.44,17.14 21.45,20.15 v21.45,22.1
USB_DM  (via drill 0.35)
  Top 0.152: U7.32 25.45,30.3 24.77,30.3 24.5,30.03 23.6,30.03 v23.5,30.13
  Bottom 0.152: v23.5,30.13 22.13,30.13 19.95,32.31 | J7.A7 20.92,37.34 20.92,37.88 20.79,38.02 20.3,38.02 20.16,37.88 20.16,37.34 J7.B7 20.14,37.12 20.14,34.45 D9.4 19.13,33.13 19.95,32.31 | 19.95,32.31 TP9.TP
USB_DP  (via drill 0.35)
  Top 0.152: U7.33 24.72,30.9 24.43,30.61 v24.21,30.61
  Bottom 0.152: v24.21,30.61 23.71,31.11 22.31,31.11 21.05,32.37 D9.3 21.65,34.03 21.65,36.25 21.39,36.51 | 21.39,36.51 21.29,36.41 20.8,36.41 20.66,36.55 20.66,37.09 J7.A6 | 21.39,36.51 21.52,36.65 21.52,37.19 J7.B6 21.54,36.4 21.58,36.36 22.61,36.36 22.98,36 R15.2 23.5,35.81 TP10.TP
  other vias: 23.5,36
VBUS  (1 unrouted)
VCC  (via drill 0.35)
  Top 0.152: D2.C 6.14,41.43 C5.1 | IC1.1 11.86,22.66 13.19,22.66 C13.2 | R3.1 24.1,20.25 C21.1 22.95,19.7 19.02,19.7 16.59,22.13 13.88,22.13 13.75,22.26 C13.2 | v23.15,13.82 22,13.82 Q1.5_8 | C13.2 13.17,21.84 C9.1
  Bottom 0.152: v4.97,43 4.97,42.27 U1.4 5.52,42.36 5.52,42.98 5.7,43.16 7.7,43.16 7.88,42.98 7.88,42.36 U1.5
  other vias: 3.2,17 4,17 4.8,17 3.2,16.2 4,16.2 4.8,16.2 3.2,15.4 4,15.4 4.8,15.4 2.4,17 2.4,16.2 2.4,15.4 21.55,15.4 22.35,15.4 23.15,15.4 21.55,14.6 22.35,14.6 23.15,14.6 21.55,13.8 22.35,13.8 20.75,15.4 20.75,14.6 20.75,13.8 1.7,34.05 2.5,34.05 3.3,34.05 1.7,33.25 2.5,33.25 3.3,33.25 1.7,32.45 2.5,32.45 3.3,32.45 0.9,34.05 0.9,33.25 0.9,32.45 1.7,36.5 2.5,36.5 3.3,36.5 1.7,35.7 2.5,35.7 3.3,35.7 1.7,34.9 2.5,34.9 3.3,34.9 0.9,36.5 0.9,35.7 0.9,34.9 4.1,34.05 4.1,33.25 4.1,32.45 4.1,36.5 4.1,35.7 4.1,34.9 4.95,34.05 4.95,33.25 4.95,32.45 4.95,36.5 4.95,35.7 4.95,34.9
  pour Top (no thermals): 0,15 7,15 7,21 5.7,22.3 5.7,45 0,45
  pour Top (no thermals): 23.35,13.5 20.75,13.5 19.6,14.65 19.6,18 21.9,20.3 24.2,20.3 24.2,14.35
  pour Bottom (no thermals): 0,15 7,15 7,21 5.7,22.3 5.7,45 0,45
  pour Bottom (no thermals): 7,17.7 7.7,17 18.6,17 21.2,19.6 24.2,19.6 24.2,13 21.2,10 0,10 0,15 7,15
  pour Route2 (no thermals): 0,15 7,15 7,21 5.7,22.3 5.7,45 0,45
  pour Route15 (no thermals): 0,15 7,15 7,21 5.7,22.3 5.7,45 0,45
  pour Route15 (no thermals): 7,17.7 7.7,17 18.6,17 21.2,19.6 24.2,19.6 24.2,13 21.2,10 0,10 0,15 7,15
  pour Route2 (no thermals): 23.35,13.5 20.75,13.5 19.6,14.65 19.6,18 21.9,20.3 24.2,20.3 24.2,14.35
VCP
  Top 0.152: IC1.2 11.9,23.89 12.05,23.88 C9.2
VCS  (via drill 0.35)
  other vias: 17.5,18.9 9,19.3 9.2,17.8 10,17.8 10.8,17.8 16.2,17.8 17,17.8 17.8,17.8 15.5,19.9 15.5,20.7 15.5,21.5 13.8,19.8 13.8,20.6 13.8,21.4 15.5,19.1 13.8,19 13.8,18.2 14.6,17.9
  pour Top (no thermals): 7.5,17.4 18.4,17.4 18.4,19.8 7.5,19.8
  pour Bottom (no thermals): 18.5,17.4 8.8,17.4 8.8,19.5 11.1,21.8 16.7,21.8 18.5,20
  pour Route15 (no thermals): 8.8,19.5 8.8,17.5 18.5,17.5 18.5,20 16.7,21.8 11.1,21.8
  pour Route2 (no thermals): 8.8,19.5 8.8,17.5 18.5,17.5 18.5,20 16.7,21.8 11.1,21.8
  pour Top (no thermals): 18.5,17.4 8.8,17.4 8.8,19.5 11.1,21.8 16.7,21.8 18.5,20
VREF
  Top 0.152: R6.1 10.7,29.47 R7.2 10.58,29.29 10.06,28.77 10.06,27.76 10.24,27.57 10.32,27.57 10.76,27.14 10.76,26.26 IC1.6
VSENSE
  Top 0.152: R3.2 25.1,22.7 24.6,23.2 C1.2 24.1,23.4 R4.1 23.23,23.77 23.23,23.95 22.6,24.57 22.3,24.57 22.05,24.83 U7.20